# Altium PCB debug-v1b.PcbDoc
Units mm, origin at the board's own origin, x right, y up, seen from the top; angles counter-clockwise.
Board outline 13.5 x 50.2 mm, 2 copper layers (Top Layer, Bottom Layer), stack 0.108 mm thick; 2 components, 26 nets, 84 pads, 0 vias.
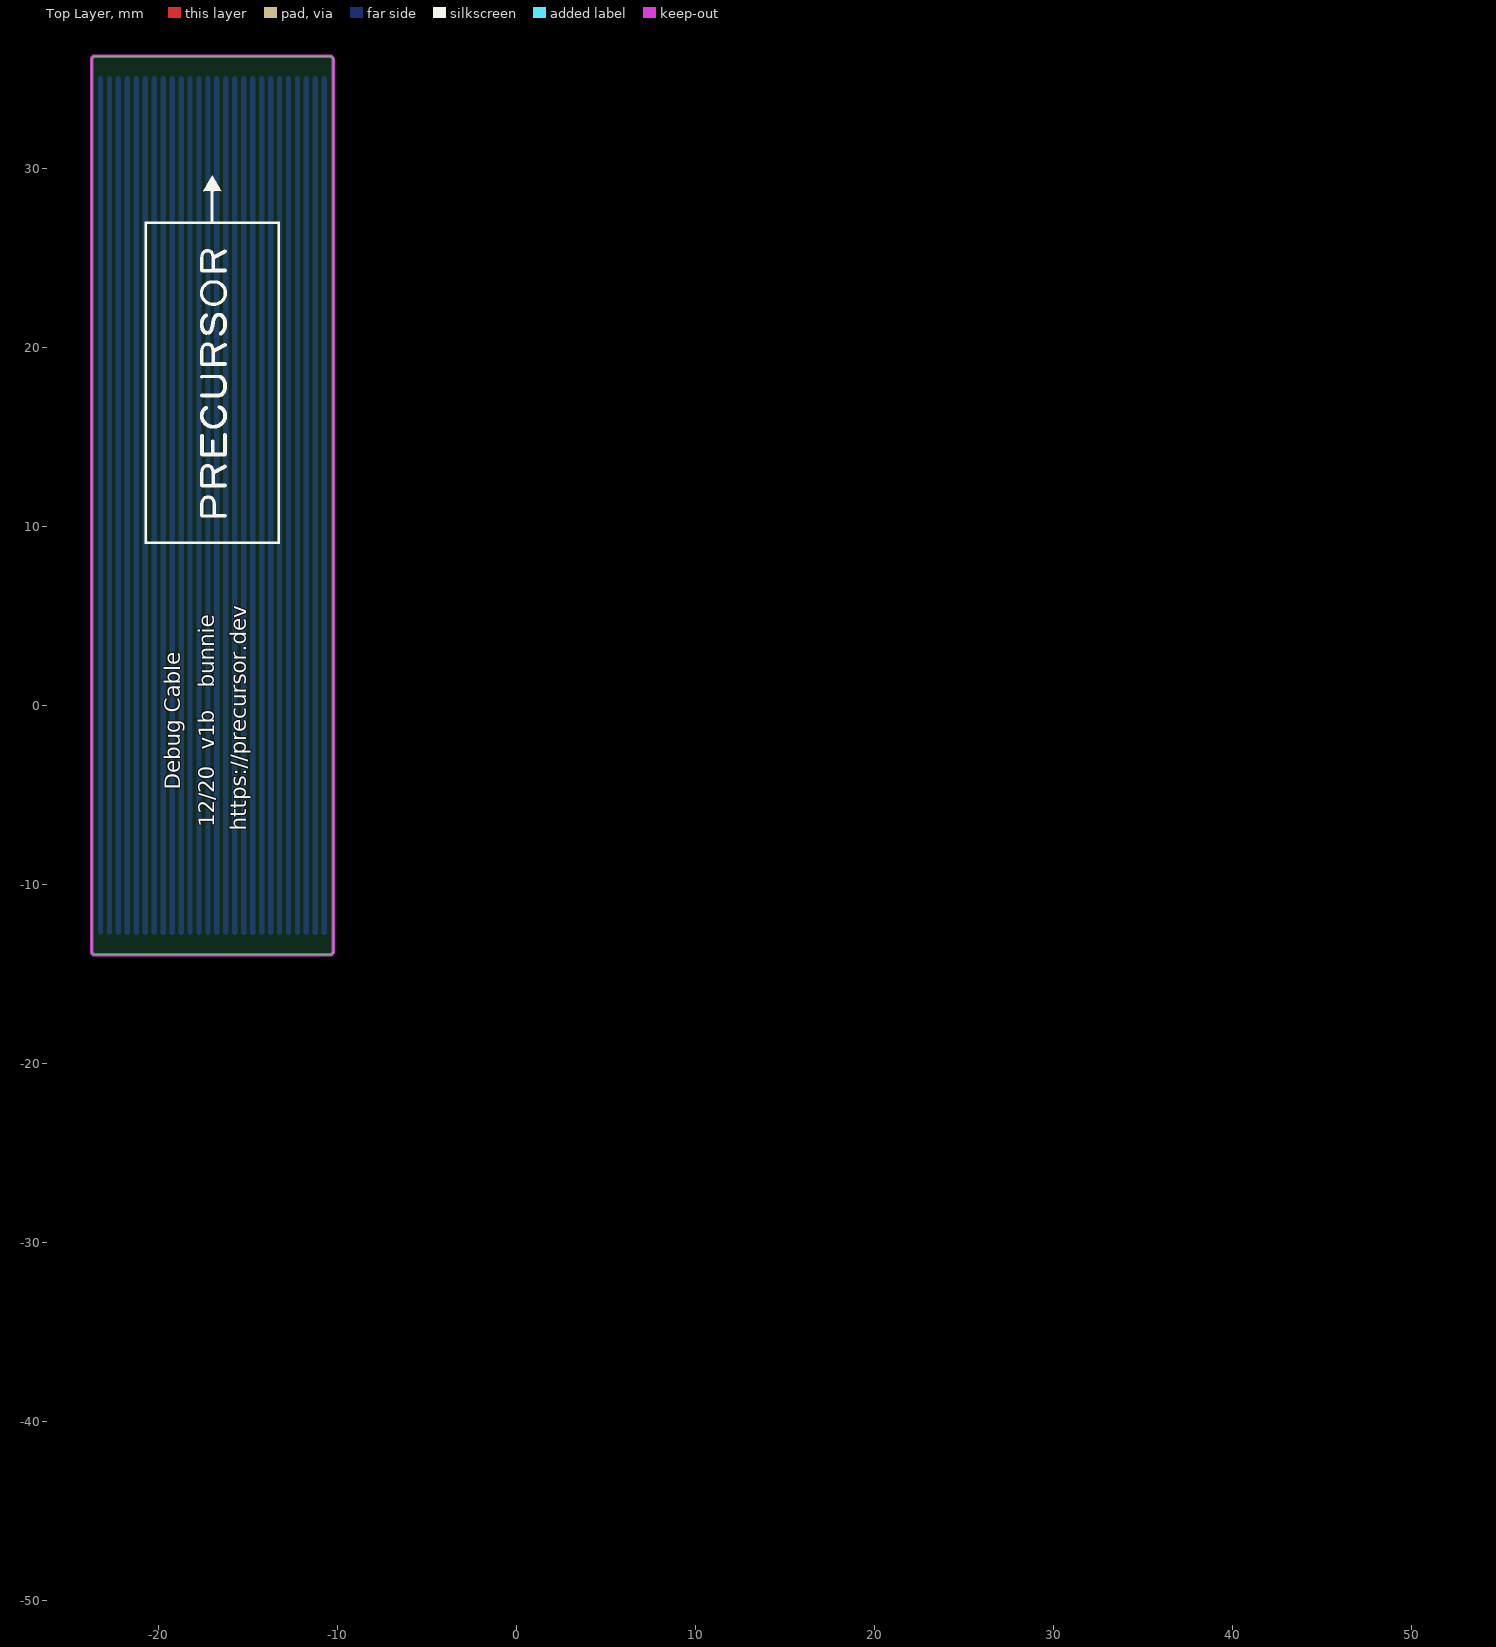
[diagram p0: Top Layer view]
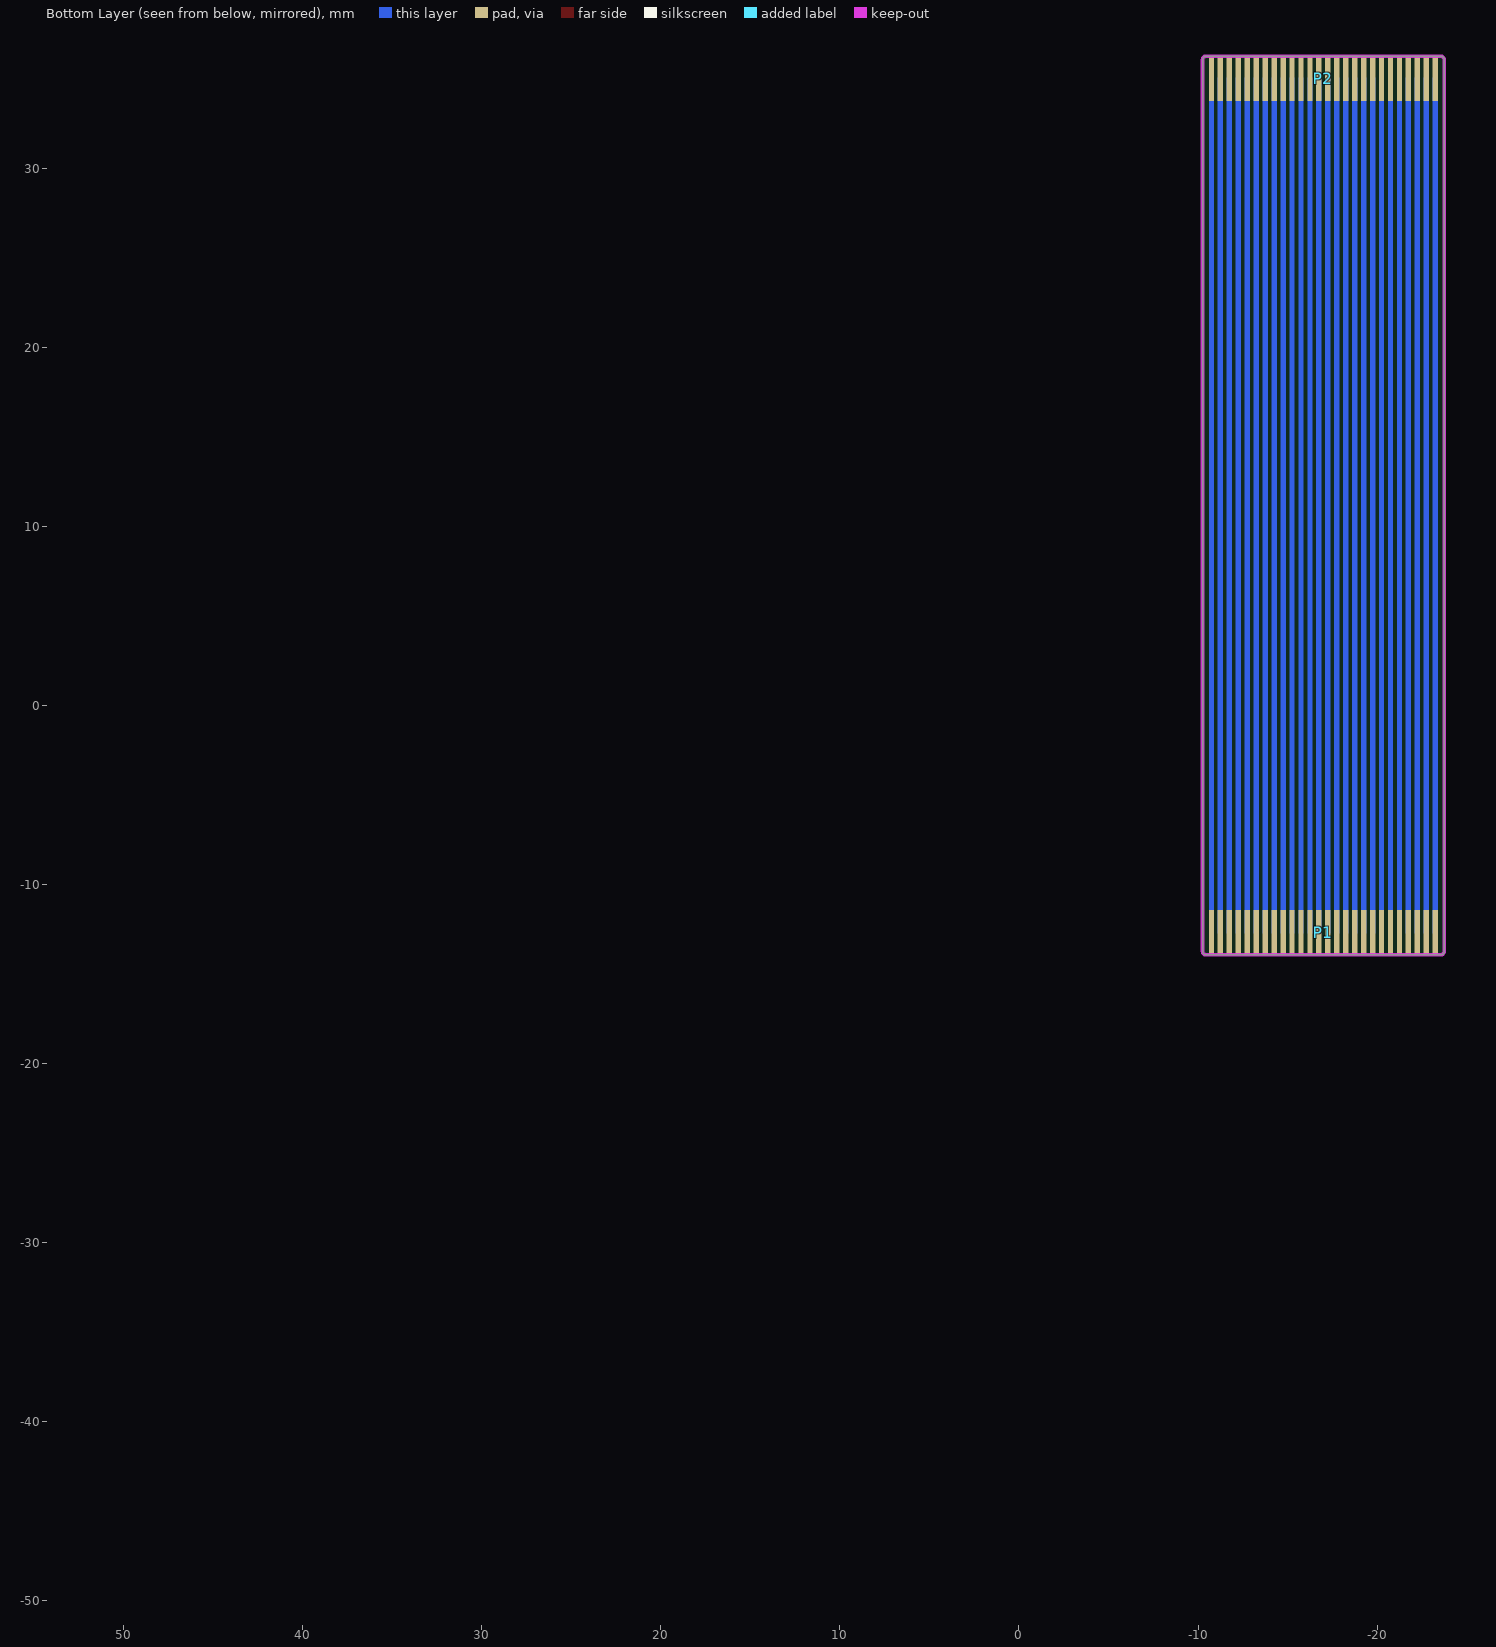
[diagram p1: Bottom Layer view, seen from below]

## Layer stack, top to bottom
Top Coverlay: solder mask 0.012, Dk 4
Top Layer: signal copper 0.02
Dielectric 2: prepreg 0.028, Composite dielectric, Dk 3.952
Dielectric 1: prepreg 0.012, Composite dielectric, Dk 3.952
Dielectric 3: prepreg 0.028, Composite dielectric, Dk 3.952
Bottom Layer: signal copper 0.02
Bottom Coverlay: solder mask 0.012, Dk 4

## Board outline
-23.75,-13.75 -23.75,36.05 cw(c-23.55,36.05) -23.55,36.25 -10.45,36.25 cw(c-10.45,36.05) -10.25,36.05 -10.25,-13.75 cw(c-10.45,-13.75) -10.45,-13.95 -23.55,-13.95 cw(c-23.55,-13.75)

## Design rules (kind name [scope] priority, off if disabled: settings)
BoardOutlineClearance [All] p1: gap=0.2 ignorepadtopadclearanceinfootprint=FALSE except(0: Arc-SplitContinuation Track-SplitContinuation SMDPad-SplitContinuation THPad-SplitContinuation Via-SplitContinuation Fill-SplitContinuation Poly-SplitContinuation Region-SplitContinuation Text-SplitContinuation)
Clearance Clearance_2 [InPolygon] p1: gap=0.25 ignorepadtopadclearanceinfootprint=FALSE except(0: Arc-Hole Track-Hole SMDPad-Hole THPad-Hole Via-Hole Fill-Hole Poly-Hole Region-Hole Text-Hole)
Clearance Clearance_1 [InComponent('P1') vs OnLayer('Keep-Out Layer')] p2: gap=0 ignorepadtopadclearanceinfootprint=FALSE
Clearance [All] p3: gap=0.15 ignorepadtopadclearanceinfootprint=FALSE except(0: Arc-Hole Track-Hole SMDPad-Hole THPad-Hole Via-Hole Fill-Hole Poly-Hole Region-Hole Text-Hole)
ComponentClearance [All] p1 off: gap=0.254 collisioncheckmode=3 verticalgap=0.254 showdistances=FALSE
Height [All] p1 off: minheight=0 maxheight=25.4 prefheight=12.7
MinimumSolderMaskSliver [All] p1 off: minsoldermaskwidth=0.254
PolygonConnect [All] p1: connectstyle=Relief reliefconductorwidth=0.25 reliefentries=4 polygonreliefangle="90 Angle" airgapwidth=0.15
RoutingVias [All] p1: holewidth=0.35 width=0.8 viastyle="Through Hole" minholewidth=0.25 minwidth=0.5 maxholewidth=0.7 maxwidth=1
SilkToSilkClearance [All] p1 off: silktosilkclearance=0.254
SilkToSolderMaskClearance [IsPad] p1 off: minsilkscreentomaskgap=0.254 clearancetoexposedcopper=TRUE
SolderMaskExpansion [All] p1: expansion=0.102 istentingtop=FALSE
Width [All] p1: maxlimit=5 minlimit=0.15 preferedwidth=0.15
25 further rules are at their usual default settings.

## Components (designator, comment, footprint, x,y, rotation, side; value= is the part's Value field where it differs from the comment)
P1 "26-pin FPC" HRS_FH34SRJ-26S-FPC -17,-12.7 r0 top
P2 "26-pin FPC" HRS_FH34SRJ-26S-FPC -17,35 r180 top

## Footprints (in the part's own frame and the unit in brackets; to place one, negate y for a bottom-side part, rotate by r counter-clockwise, add the part's x,y. Pads: shape width x height; smd on the part's side, far side on the other; paste and mask are expansions set on the pad)
HRS_FH34SRJ-26S-FPC [mm] "FPC pattern for mating to FH34SRJ-26S"
  rect 0.3x2.5 smd far side mask+0.07: 1(-6.25,0) 2(-5.75,0) 3(-5.25,0) 4(-4.75,0) 5(-4.25,0) 6(-3.75,0) 7(-3.25,0) 8(-2.75,0) 9(-2.25,0) 10(-1.75,0) 11(-1.25,0) 12(-0.75,0) 13(-0.25,0) 14(0.25,0) 15(0.75,0) 16(1.25,0) 17(1.75,0) 18(2.25,0) 19(2.75,0) 20(3.25,0) 21(3.75,0) 22(4.25,0) 23(4.75,0) 24(5.25,0) 25(5.75,0) 26(6.25,0)

## Part data
P1 P2: library part FPC-26, "26 Pin FPC footprint", MPN=DNP, MYPN=DNP, System=Connector, VENDOR="FPC pattern"

## Free pads (board coordinates)
  rect 0.3x1.6 on Mech1 mask+0.05: 1(44.25,-45.125) 2(44.75,-45.125) 3(45.25,-45.125) 4(45.75,-45.125) 5(46.25,-45.125) 6(46.75,-45.125) 7(47.25,-45.125) 8(47.75,-45.125) 9(48.25,-45.125) 10(48.75,-45.125) 11(49.25,-45.125) 12(49.75,-45.125) 13(50.25,-45.125) 14(50.75,-45.119) 15(51.25,-45.125) 16(51.75,-45.125) 17(51.75,-48.725) 18(51.25,-48.725) 19(50.75,-48.725) 20(50.25,-48.721) 21(49.75,-48.725) 22(49.25,-48.725) 23(48.75,-48.725) 24(48.25,-48.725) 25(47.75,-48.725) 26(47.25,-48.725) 27(46.75,-48.725) 28(46.25,-48.725) 29(45.75,-48.725) 30(45.25,-48.725) 31(44.75,-48.725) 32(44.25,-48.725)

## Nets (pads, with @x,y where several pads share a name; then routed paths per layer and width w, separated by ;. In a path a pad name is that pad's centre, name@x,y a point inside that pad or via, vN(x,y) a via of type N, cw(c..) or ccw(c..) an arc to the next point about the centre after c; other vN are vias at no path point)
NetP1_1: P1.1 P2.26 | length 47.7
  Bottom Layer w0.3: P1.1 P2.26
NetP1_2: P1.2 P2.25 | length 47.7
  Bottom Layer w0.3: P1.2 P2.25
NetP1_3: P1.3 P2.24 | length 47.7
  Bottom Layer w0.3: P1.3 P2.24
NetP1_4: P1.4 P2.23 | length 47.7
  Bottom Layer w0.3: P1.4 P2.23
NetP1_5: P1.5 P2.22 | length 47.7
  Bottom Layer w0.3: P1.5 P2.22
NetP1_6: P1.6 P2.21 | length 47.7
  Bottom Layer w0.3: P1.6 P2.21
NetP1_7: P1.7 P2.20 | length 47.7
  Bottom Layer w0.3: P1.7 P2.20
NetP1_8: P1.8 P2.19 | length 47.7
  Bottom Layer w0.3: P1.8 P2.19
NetP1_9: P1.9 P2.18 | length 47.7
  Bottom Layer w0.3: P1.9 P2.18
NetP1_10: P1.10 P2.17 | length 47.7
  Bottom Layer w0.3: P1.10 P2.17
NetP1_11: P1.11 P2.16 | length 47.7
  Bottom Layer w0.3: P1.11 P2.16@-18.25,35
NetP1_12: P1.12 P2.15 | length 47.7
  Bottom Layer w0.3: P1.12 P2.15
NetP1_13: P1.13 P2.14 | length 47.7
  Bottom Layer w0.3: P1.13 P2.14
NetP1_14: P1.14 P2.13 | length 47.7
  Bottom Layer w0.3: P1.14 P2.13
NetP1_15: P1.15 P2.12 | length 47.7
  Bottom Layer w0.3: P1.15 P2.12
NetP1_16: P1.16 P2.11 | length 47.7
  Bottom Layer w0.3: P1.16 P2.11
NetP1_17: P1.17 P2.10 | length 47.7
  Bottom Layer w0.3: P1.17 P2.10
NetP1_18: P1.18 P2.9 | length 47.7
  Bottom Layer w0.3: P1.18 P2.9
NetP1_19: P1.19 P2.8 | length 47.7
  Bottom Layer w0.3: P1.19 P2.8
NetP1_20: P1.20 P2.7 | length 47.7
  Bottom Layer w0.3: P1.20 P2.7
NetP1_21: P1.21 P2.6 | length 47.7
  Bottom Layer w0.3: P1.21 P2.6
NetP1_22: P1.22 P2.5 | length 47.7
  Bottom Layer w0.3: P1.22 P2.5
NetP1_23: P1.23 P2.4 | length 47.7
  Bottom Layer w0.3: P1.23 P2.4
NetP1_24: P1.24 P2.3 | length 47.7
  Bottom Layer w0.3: P1.24 P2.3
NetP1_25: P1.25 P2.2 | length 47.7
  Bottom Layer w0.3: P1.25 P2.2
NetP1_26: P1.26 P2.1 | length 47.7
  Bottom Layer w0.3: P1.26 P2.1

## Keep-outs
Keep-Out Layer:
  lines w0.2: -23.75,-13.75 ccw(c-23.55,-13.75) -23.55,-13.95 -10.45,-13.95 ccw(c-10.45,-13.75) -10.25,-13.75 -10.25,-10.7 -10.25,33 -10.25,36.05 ccw(c-10.45,36.05) -10.45,36.25 -23.55,36.25 ccw(c-23.55,36.05) -23.75,36.05 -23.75,33 -23.75,-10.7 -23.75,-13.75

## Silkscreen, mask and mechanical layers (free items; w line width, h text height)
Top Overlay:
  drawing of 10 lines, arcs and shapes, not listed
  text "bunnie" at -16.599,0.983 h1.5 r90
  text "v1b" at -16.6,-2.5 h1.5 r90
  text "Debug Cable" at -18.499,-4.717 h1.5 r90
  text "12/20" at -16.599,-6.817 h1.5 r90
  text "https://precursor.dev" at -14.799,-7.017 h1.5 r90
Bottom Coverlay:
  rectangle: -24.275,34.75 -9.775,36.25
  rectangle: -24.425,-13.95 -9.925,-12.45
Mechanical 1:
  drawing of 2662 lines, arcs and shapes, not listed
  text "1.00" at -7.68,117.37 h3.5
  text "1.15" at -2.946,99.757 h3.5 r30
  text "SECTION B-B" at 28.578,99.445 h3.5
  text "0.58" at -28.984,91.474 h3.5 r90
  text "A" at -12.355,89.829 h3.5
  text "9.00" at -17.332,77.153 h3.5
  text "note 0.15mm + 0.1mm offset of speaker to right to accommodate \"ramp\" + tolerance" at 0.2,70.093 h1.5
  text "B" at -49.691,54.644 h3.5
  text "B" at 42.405,54.644 h3.5
  text "61.65" at -45.767,29.823 h3.5 r90
  text "17.00" at -12.07,-1.037 h3.5
  text "1.08" at -91.172,-3.826 h3.5
  text "3.1mm hypot" at -95.5,-12.999 h1.5
  text "13.75" at -58.891,-14.115 h3.5 r90
  text "2.9mm run" at -95.6,-15.599 h1.5
  text "SECTION A-A" at -60.238,-84.772 h3.5
  text "A" at -12.355,-92.041 h3.5
Mechanical 2:
  lines w0.2: -23.75,-13.75 ccw(c-23.55,-13.75) -23.55,-13.95 ; -23.75,-13.75 ccw(c-23.55,-13.75) -23.55,-13.95 ; -23.75,-13.75 -23.75,-10.7 -23.75,-13.75 ; -23.55,-13.95 -10.45,-13.95 ; -23.55,-13.95 -10.45,-13.95 ; -10.45,-13.95 ccw(c-10.45,-13.75) -10.25,-13.75 ; -10.45,-13.95 ccw(c-10.45,-13.75) -10.25,-13.75 ; -10.25,-13.75 -10.25,-10.7 -10.25,-13.75
Fab notes:
  lines w0.1: -23.75,-13.772 ccw(c-23.55,-13.772) -23.55,-13.972 -10.45,-13.972 ccw(c-10.45,-13.772) -10.25,-13.772 -10.25,-11.472 -23.75,-11.472 -23.75,-13.772
  lines w0.2: -10,-12.25 42.5,-19.3 ; -9.775,34.225 42.175,-18.825
  lines w0.381: 43.152,-12.429 53.564,-12.429 78.703,-12.429 110.698,-12.429 127.204,-12.429 139.139,-12.429 ; 43.152,-9.381 53.564,-9.381 78.703,-9.381 110.698,-9.381 127.204,-9.381 139.139,-9.381 ; 43.152,-6.333 53.564,-6.333 78.703,-6.333 110.698,-6.333 127.204,-6.333 139.139,-6.333 ; 43.152,-3.285 53.564,-3.285 78.703,-3.285 110.698,-3.285 127.204,-3.285 139.139,-3.285 ; 43.152,-0.237 53.564,-0.237 78.703,-0.237 110.698,-0.237 127.204,-0.237 139.139,-0.237 ; 43.152,2.811 53.564,2.811 78.703,2.811 110.698,2.811 127.204,2.811 139.139,2.811 ; 43.152,5.859 53.564,5.859 78.703,5.859 110.698,5.859 127.204,5.859 139.139,5.859 ; 43.152,8.907 53.564,8.907 78.703,8.907 110.698,8.907 127.204,8.907 139.139,8.907 ; 43.152,11.955 139.139,11.955 ; 53.564,15.003 53.564,-15.477 ; 78.703,15.003 78.703,-15.477 ; 110.698,15.003 110.698,-15.477 ; 127.204,15.003 127.204,-15.477 ; 53.564,-15.477 78.703,-15.477 ; 53.564,-15.477 43.152,-15.477 43.152,15.003 139.139,15.003 139.139,-15.477 127.204,-15.477 ; 78.703,-15.477 110.698,-15.477 ; 110.698,-15.477 127.204,-15.477
  text "This is meant to be the \"standard\" layer stack from KC website at 133um total thickness. The adhesve layers are listed as \"dielectric\"" at 43.092,17.131 h1.5
  text "Layer" at 44.93,12.717 h1.52
  text "Name" at 55.342,12.717 h1.52
  text "Material" at 80.481,12.717 h1.52
  text "Thickness" at 112.476,12.717 h1.52
  text "Gerber" at 128.982,12.717 h1.52
  text "Top Overlay" at 55.342,9.669 h1.52
  text "GTO" at 128.982,9.669 h1.52
  text "Top Coverlay" at 55.342,6.621 h1.52
  text "0.012mm" at 112.476,6.621 h1.52
  text "GTS" at 128.982,6.621 h1.52
  text "1" at 44.93,3.573 h1.52
  text "Top Layer" at 55.342,3.573 h1.52
  text "0.020mm" at 112.476,3.573 h1.52
  text "GTL" at 128.982,3.573 h1.52
  text "Dielectric 2" at 55.342,0.525 h1.52
  text "Composite dielectric" at 80.481,0.525 h1.52
  text "0.028mm" at 112.476,0.525 h1.52
  text "Dielectric 1" at 55.342,-2.523 h1.52
  text "Composite dielectric" at 80.481,-2.523 h1.52
  text "0.012mm" at 112.476,-2.523 h1.52
  text "Dielectric 3" at 55.342,-5.571 h1.52
  text "Composite dielectric" at 80.481,-5.571 h1.52
  text "0.028mm" at 112.476,-5.571 h1.52
  text "2" at 44.93,-8.619 h1.52
  text "Bottom Layer" at 55.342,-8.619 h1.52
  text "0.020mm" at 112.476,-8.619 h1.52
  text "GBL" at 128.982,-8.619 h1.52
  text "Bottom Coverlay" at 55.342,-11.667 h1.52
  text "0.012mm" at 112.476,-11.667 h1.52
  text "GBS" at 128.982,-11.667 h1.52
  text "Bottom Overlay" at 55.342,-14.715 h1.52
  text "GBO" at 128.982,-14.715 h1.52
  text "Top side stiffener to 0.3mm total thickness in designated regions" at 43.4,-20.65 h1.5
  text "Finish: immersion gold" at 42.942,-30.869 h1.5
  text "Coverlay: yellow/transparent (typical color)" at 42.942,-36.869 h1.5
  text "Silkscreen: white" at 42.95,-39.425 h1.5

## Text inside footprints (layer, text, board x,y; h text height)
P1: Top Assembly "Stiffener to 0.3mm total thickness" at -23.775,-21.2 h0.8
P2: Top Assembly "Stiffener to 0.3mm total thickness" at -10.225,43.5 h0.8 r180